# Altium PCB PCB2.PcbDoc
Units mm, origin at the board's own origin, x right, y up, seen from the top; angles counter-clockwise.
Board outline 228.98 x 105.92 mm, 2 copper layers (Top Layer, Bottom Layer); 64 components, 39 nets, 225 pads, 3 vias.
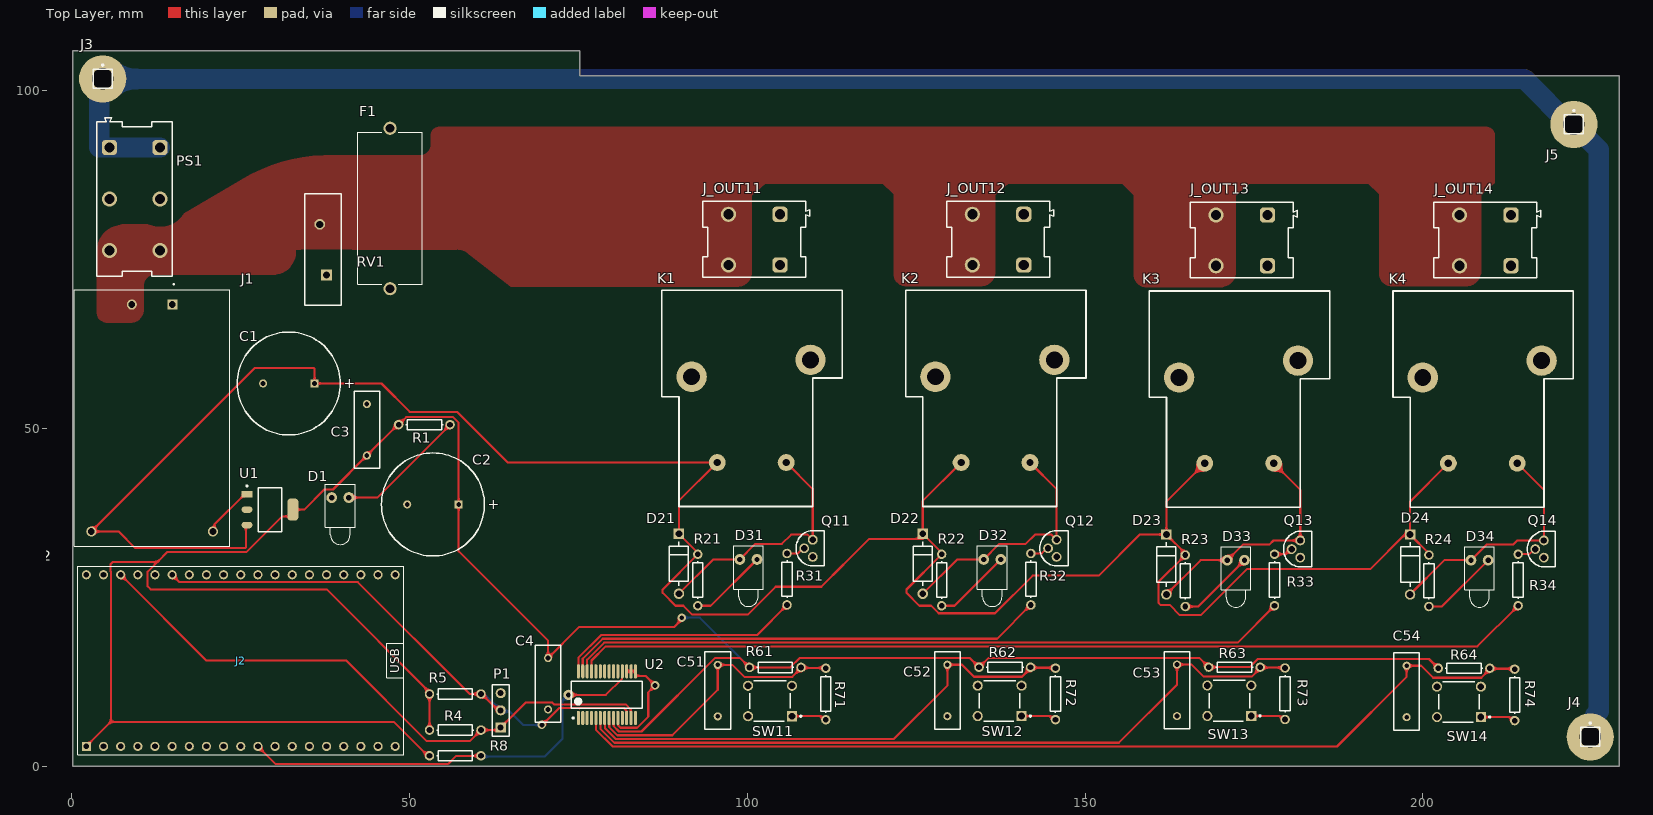
[diagram p0: Top Layer view]
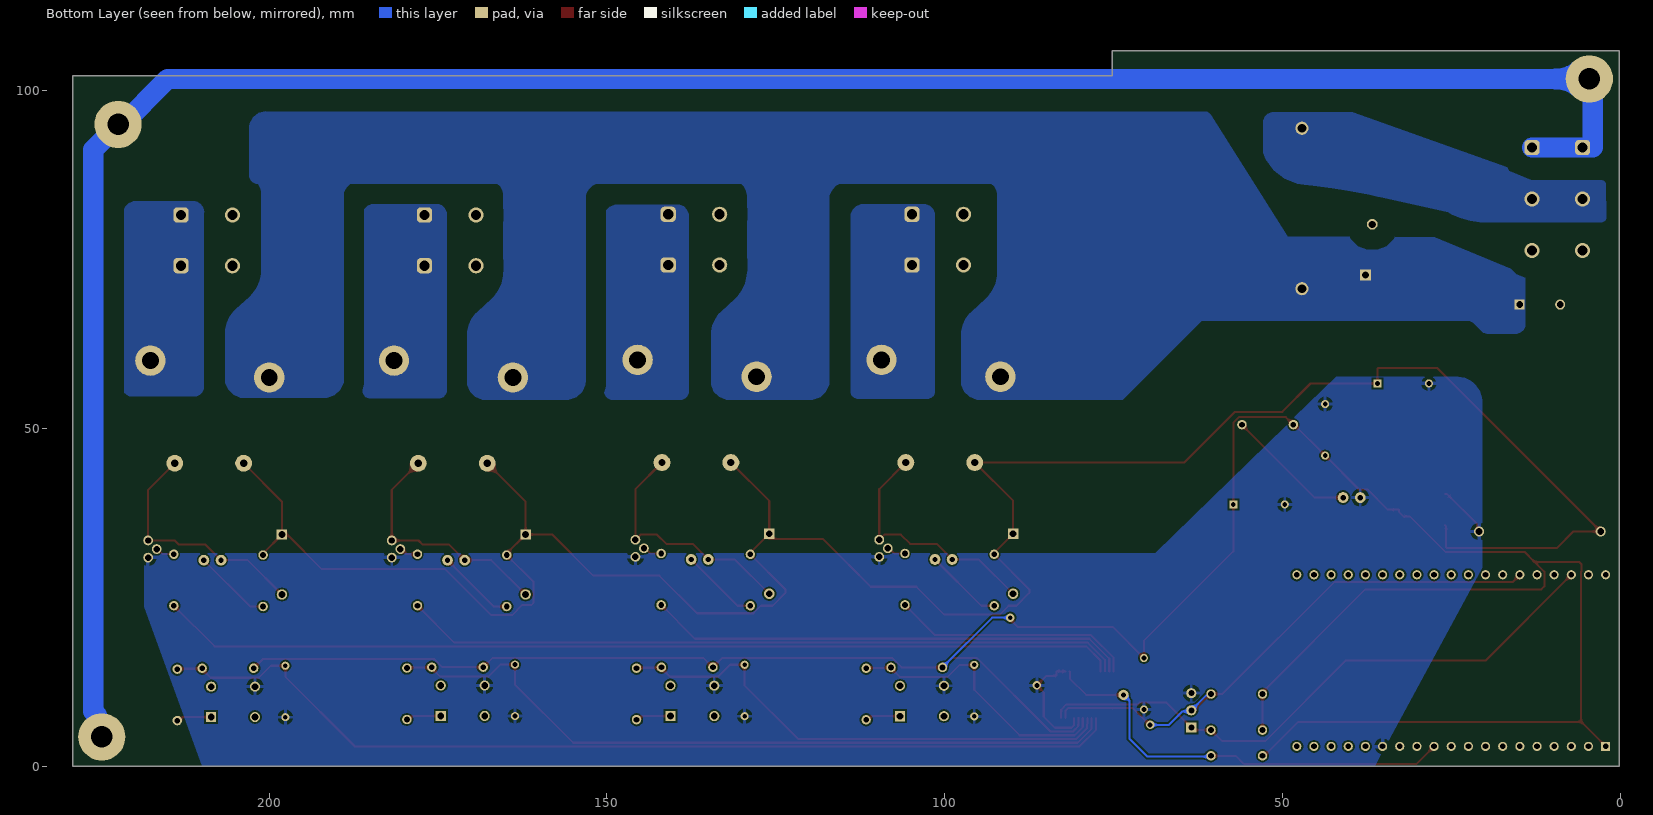
[diagram p1: Bottom Layer view, seen from below]

## Layer stack, top to bottom
Top Solder: solder mask 0.0102, Solder Resist, Dk 3.5
Top Layer: signal copper 0.0356
Dielectric 1: dielectric 0.32, FR-4, Dk 4.8
Bottom Layer: signal copper 0.0356
Bottom Solder: solder mask 0.0102, Solder Resist, Dk 3.5

## Board outline
0.127,0 229.108,0 229.108,0.127 229.108,102.235 75.184,102.235 75.184,105.918 0.127,105.918

## Design rules (kind name [scope] priority, off if disabled: settings)
Clearance Clearance_HV_PE_Isolation [InNetClass('PE_NETS') vs InNetClass('HV_NETS')] p1: gap=3 ignorepadtopadclearanceinfootprint=FALSE
Clearance Clearance_HV_Isolation [InNetClass('HV_Nets') vs InNetClass('LV_Nets')] p2: gap=6 ignorepadtopadclearanceinfootprint=FALSE
Clearance Clearance_HV_Internal [InNetClass('HV_Nets') vs InNetClass('HV_NETS')] p3: gap=3 ignorepadtopadclearanceinfootprint=FALSE
Clearance Clearance_SSOP [InComponent('U2')] p4: gap=0.18 ignorepadtopadclearanceinfootprint=FALSE
Clearance [All] p5: gap=0.25 ignorepadtopadclearanceinfootprint=FALSE
HoleSize [All] p1: absolutevalues=TRUE maxlimit=6 minlimit=0.025 maxpercent=80.000 minpercent=20.000
PolygonConnect Connect_HV_Solid [InNetClass('HV_NETS')] p1: connectstyle=Direct reliefconductorwidth=3 reliefentries=4 polygonreliefangle="90 Angle" airgapwidth=0.254
PolygonConnect [All] p2: connectstyle=Relief reliefconductorwidth=0.5 reliefentries=4 polygonreliefangle="90 Angle" airgapwidth=0.5
RoomDefinition Relay_Channel1 [InComponentClass('Relay_Channel1')] p1: confinementstyle=ConfineIn formatcopy=TRUE lockcomponents=FALSE outline 86.838,22.082 114.778,22.082 114.778,87.487 86.838,87.487
RoomDefinition U_PSU [InComponentClass('U_PSU')] p2: confinementstyle=ConfineIn formatcopy=TRUE lockcomponents=FALSE outline 0,30.096 62.484,30.096 62.484,108.712 0,108.712
RoomDefinition U_I2C [InComponentClass('U_I2C')] p3: confinementstyle=ConfineIn formatcopy=TRUE lockcomponents=FALSE outline 66.294,3.937 66.294,12.319 50.975,12.319 50.975,3.937
RoomDefinition U_Reset_Block [InComponentClass('U_Reset_Block')] p4: confinementstyle=ConfineIn formatcopy=TRUE lockcomponents=FALSE outline 61.468,0.127 61.468,2.921 52.07,2.921 52.07,0.127
RoomDefinition U_Earth_Connectors [InComponentClass('U_Earth_Connectors')] p5: confinementstyle=ConfineIn formatcopy=TRUE lockcomponents=FALSE outline 33.401,130.937 88.011,130.937 88.011,145.034 33.401,145.034
RoomDefinition Button_Input_Block2 [InComponentClass('Button_Input_Block2')] p6: confinementstyle=ConfineIn formatcopy=TRUE lockcomponents=FALSE outline 127.466,5.354 146.897,5.354 146.897,17.165 127.466,17.165
RoomDefinition Button_Input_Block3 [InComponentClass('Button_Input_Block3')] p7: confinementstyle=ConfineIn formatcopy=TRUE lockcomponents=FALSE outline 161.459,5.374 180.89,5.374 180.89,17.185 161.459,17.185
RoomDefinition U_IO_Expander [InComponentClass('U_IO_Expander')] p8: confinementstyle=ConfineIn formatcopy=TRUE lockcomponents=FALSE outline 67.845,5.589 84.863,5.589 84.863,18.162 67.845,18.162
RoomDefinition Button_Input_Block1 [InComponentClass('Button_Input_Block1')] p9: confinementstyle=ConfineIn formatcopy=TRUE lockcomponents=FALSE outline 93.472,5.334 112.903,5.334 112.903,17.145 93.472,17.145
RoomDefinition Button_Input_Block4 [InComponentClass('Button_Input_Block4')] p10: confinementstyle=ConfineIn formatcopy=TRUE lockcomponents=FALSE outline 195.453,5.207 214.884,5.207 214.884,17.018 195.453,17.018
RoomDefinition Relay_Channel2 [InComponentClass('Relay_Channel2')] p11: confinementstyle=ConfineIn formatcopy=TRUE lockcomponents=FALSE outline 122.936,22.082 150.876,22.082 150.876,87.487 122.936,87.487
RoomDefinition Relay_Channel3 [InComponentClass('Relay_Channel3')] p12: confinementstyle=ConfineIn formatcopy=TRUE lockcomponents=FALSE outline 159.004,21.971 186.944,21.971 186.944,87.376 159.004,87.376
RoomDefinition Relay_Channel4 [InComponentClass('Relay_Channel4')] p13: confinementstyle=ConfineIn formatcopy=TRUE lockcomponents=FALSE outline 195.072,21.971 223.012,21.971 223.012,87.376 195.072,87.376
RoomDefinition U_MCU_Core [InComponentClass('U_MCU_Core')] p14: confinementstyle=ConfineIn formatcopy=TRUE lockcomponents=FALSE outline 50.292,1.651 50.292,30.099 -0.127,30.099 -0.127,1.651
RoutingVias [All] p1: holewidth=0.711 width=1.27 viastyle="Through Hole" minholewidth=0.711 minwidth=1.27 maxholewidth=0.711 maxwidth=1.27
SilkToSilkClearance [All] p1: silktosilkclearance=0
SilkToSolderMaskClearance [IsPad] p1: minsilkscreentomaskgap=0 clearancetoexposedcopper=TRUE
SolderMaskExpansion [All] p1: expansion=0.102 istentingtop=FALSE
Width Width_PE [InNetClass('PE_NETS')] p1: maxlimit=3 minlimit=3 preferedwidth=3
Width Width_HV [InNetClass('HV_Nets')] p2: maxlimit=50 minlimit=3 preferedwidth=4
Width Width_1 [All] p3: maxlimit=0.508 minlimit=0.25 preferedwidth=0.305
27 further rules are at their usual default settings.

## Classes and differential pairs
net class PE_NETS: AC_PE
component class U_Earth_Connectors: J3 J4 J5
net class LV_NETS: +3V3 +5V DRV_SIG1 DRV_SIG2 DRV_SIG3 DRV_SIG4 GND IN_SIG1 IN_SIG2 IN_SIG3 IN_SIG4 NetD1_1 NetD21_2 NetD22_2 NetD23_2 NetD24_2 NetD31_1 NetD32_1 NetD33_1 NetD34_1 NetJ2_11 NetJ2_33 NetJ2_36 NetQ11_2 NetQ12_2 NetQ13_2 NetQ14_2
net class HV_NETS: AC_L_FUSED AC_N NetF1_1 NetJ_OUT11_1 NetJ_OUT12_1 NetJ_OUT13_1 NetJ_OUT14_1
channel class Relay_Channel: Relay_Channel1 Relay_Channel2 Relay_Channel3 Relay_Channel4
channel class Button_Input_Block: Button_Input_Block1 Button_Input_Block2 Button_Input_Block3 Button_Input_Block4
net class DRV_SIG[1..4]: DRV_SIG1 DRV_SIG2 DRV_SIG3 DRV_SIG4
component class U_Reset_Block: R8
component class U_PSU: C1 C2 C3 D1 F1 J1 PS1 R1 RV1 U1
component class U_MCU_Core: J2
component class U_IO_Expander: C4 U2
component class U_I2C: P1 R4 R5
component class Relay_Channel4: D24 D34 J_OUT14 K4 Q14 R24 R34
component class Relay_Channel3: D23 D33 J_OUT13 K3 Q13 R23 R33
component class Relay_Channel2: D22 D32 J_OUT12 K2 Q12 R22 R32
component class Relay_Channel1: D21 D31 J_OUT11 K1 Q11 R21 R31
component class Button_Input_Block4: C54 R64 R74 SW14
component class Button_Input_Block3: C53 R63 R73 SW13
component class Button_Input_Block2: C52 R62 R72 SW12
component class Button_Input_Block1: C51 R61 R71 SW11

## Components (designator, comment, footprint, x,y, rotation, side; value= is the part's Value field where it differs from the comment)
C1 "Cap Pol1" RB7.6-15 32.131,56.642 r0 top value=10uF
C2 "Cap Pol1" RB7.6-15 53.467,38.735 r0 top value=22uF
C3 "Cap" RAD-0.3 43.688,49.784 r270 top value=100nF
C4 "Cap" RAD-0.3 70.512,12.193 r90 top value=100nF
C51 "Cap" RAD-0.3 95.631,11.176 r90 top value=100nF (schematic designator C5)
C52 "Cap" RAD-0.3 129.625,11.196 r90 top value=100nF (schematic designator C5)
C53 "Cap" RAD-0.3 163.618,11.216 r90 top value=100nF (schematic designator C5)
C54 "Cap" RAD-0.3 197.612,11.049 r90 top value=100nF (schematic designator C5)
D1 "LED1" LED-1 39.751,39.751 r270 top
D21 "1N4007" FP-1N4007-MFG 89.886,29.956 r270 top value=15pF (schematic designator D2)
D22 "1N4007" FP-1N4007-MFG 125.984,29.956 r270 top value=15pF (schematic designator D2)
D23 "1N4007" FP-1N4007-MFG 162.052,29.845 r270 top value=15pF (schematic designator D2)
D24 "1N4007" FP-1N4007-MFG 198.12,29.845 r270 top value=15pF (schematic designator D2)
D31 "LED1" LED-1 100.173,30.591 r270 top (schematic designator D3)
D32 "LED1" LED-1 136.271,30.591 r270 top (schematic designator D3)
D33 "LED1" LED-1 172.339,30.48 r270 top (schematic designator D3)
D34 "LED1" LED-1 208.407,30.48 r270 top (schematic designator D3)
F1 "0031.8201" SCHURTER_0031.8201 47.117,82.55 r270 top
J1 "691254410003" 691254410003 9.271,83.947 r270 top
J2 "ESP32-DEVKITC" ESP32-DEVKITC 25.019,15.621 r90 top
J3 "Socket" PIN1 4.572,101.727 r0 top
J4 "Socket" PIN1 224.79,4.318 r0 top
J5 "Socket" PIN1 222.377,94.996 r0 top
J_OUT11 "691254410002" 691254410002 101.031,77.988 r180 top (schematic designator J_OUT1)
J_OUT12 "691254410002" 691254410002 137.129,77.988 r180 top (schematic designator J_OUT1)
J_OUT13 "691254410002" 691254410002 173.197,77.876 r180 top (schematic designator J_OUT1)
J_OUT14 "691254410002" 691254410002 209.265,77.876 r180 top (schematic designator J_OUT1)
K1 "SLA-05VDC-SL-A" Songle_SLA-05VDC-SL-A 87.361,38.442 r0 top (schematic designator K)
K2 "SLA-05VDC-SL-A" Songle_SLA-05VDC-SL-A 123.459,38.442 r0 top (schematic designator K)
K3 "SLA-05VDC-SL-A" Songle_SLA-05VDC-SL-A 159.527,38.331 r0 top (schematic designator K)
K4 "SLA-05VDC-SL-A" Songle_SLA-05VDC-SL-A 195.595,38.331 r0 top (schematic designator K)
P1 "Header 3" HDR1X3 63.5,5.715 r90 top
PS1 "HLK-5M05" CONV_HLK-5M05 11.89,51.526 r270 top
Q11 "SS8050DBU" FP-135AN-MFG 109.318,32.242 r0 top (schematic designator Q1)
Q12 "SS8050DBU" FP-135AN-MFG 145.416,32.242 r0 top (schematic designator Q1)
Q13 "SS8050DBU" FP-135AN-MFG 181.484,32.131 r0 top (schematic designator Q1)
Q14 "SS8050DBU" FP-135AN-MFG 217.552,32.131 r0 top (schematic designator Q1)
R1 "Res1" AXIAL-0.3 52.197,50.546 r180 top value=1K
R4 "Res1" AXIAL-0.3 56.769,5.334 r180 top value=4.7K
R5 "Res1" AXIAL-0.3 56.769,10.668 r180 top value=4.7K
R8 "Res1" AXIAL-0.3 56.769,1.524 r180 top value=10K
R21 "Res1" AXIAL-0.3 92.68,27.543 r90 top value=470 (schematic designator R2)
R22 "Res1" AXIAL-0.3 128.778,27.543 r90 top value=470 (schematic designator R2)
R23 "Res1" AXIAL-0.3 164.846,27.432 r90 top value=470 (schematic designator R2)
R24 "Res1" AXIAL-0.3 200.914,27.432 r90 top value=470 (schematic designator R2)
R31 "Res1" AXIAL-0.3 105.888,27.67 r90 top value=1K (schematic designator R3)
R32 "Res1" AXIAL-0.3 141.986,27.67 r90 top value=1K (schematic designator R3)
R33 "Res1" AXIAL-0.3 178.054,27.559 r90 top value=1K (schematic designator R3)
R34 "Res1" AXIAL-0.3 214.122,27.559 r90 top value=1K (schematic designator R3)
R61 "Res1" AXIAL-0.3 104.14,14.605 r180 top value=10K (schematic designator R6)
R62 "Res1" AXIAL-0.3 138.134,14.625 r180 top value=10K (schematic designator R6)
R63 "Res1" AXIAL-0.3 172.127,14.645 r180 top value=10K (schematic designator R6)
R64 "Res1" AXIAL-0.3 206.121,14.478 r180 top value=10K (schematic designator R6)
R71 "Res1" AXIAL-0.3 111.633,10.668 r90 top value=1K (schematic designator R7)
R72 "Res1" AXIAL-0.3 145.627,10.688 r90 top value=1K (schematic designator R7)
R73 "Res1" AXIAL-0.3 179.62,10.708 r90 top value=1K (schematic designator R7)
R74 "Res1" AXIAL-0.3 213.614,10.541 r90 top value=1K (schematic designator R7)
RV1 "MOV-14D471K" FP-MOV-14D471K-MFG 37.211,76.454 r90 top value=516pF
SW11 "B3F-1000" OMRON-B3F-1000-4_V 103.372,9.636 r180 top (schematic designator SW1)
SW12 "B3F-1000" OMRON-B3F-1000-4_V 137.366,9.656 r180 top (schematic designator SW1)
SW13 "B3F-1000" OMRON-B3F-1000-4_V 171.359,9.675 r180 top (schematic designator SW1)
SW14 "B3F-1000" OMRON-B3F-1000-4_V 205.353,9.509 r180 top (schematic designator SW1)
U1 "AMS1117-3.3" FP-AMS1117-IPC_A 29.337,37.973 r0 top
U2 "MCP23017-E/SS" SSOP-SS28_N 79.222,10.578 r90 top

## Footprints (in the part's own frame and the unit in brackets; to place one, negate y for a bottom-side part, rotate by r counter-clockwise, add the part's x,y. Pads: shape width x height; smd on the part's side, far side on the other; paste and mask are expansions set on the pad)
691254410002 [mm] "Serie 2544 - 7.62 mm _ 2 pins"
  rrect50% 2.25x2.25 hole 1.5: 1(-3.81,3.8) 1(-3.81,-3.7)
  round 2.25 hole 1.5: 2(3.81,3.8) 2(3.81,-3.7)
  silkscreen extent -8.22,-5.6 7.62,5.6, body extent -8.22,-5.6 7.62,5.6, height 18.05
691254410003 [mm] "Serie 2544 - 7.62 mm _ 3 pins"
  rrect50% 2.25x2.25 hole 1.5: 1(-7.62,-3.7) 1(-7.62,3.8)
  round 2.25 hole 1.5: 2(0,3.8) 2(0,-3.7) 3(7.62,-3.7) 3(7.62,3.8)
  silkscreen extent -12.03,-5.6 11.43,5.6, body extent -12.03,-5.6 11.43,5.6, height 18.05
AXIAL-0.3 [mm] "Axial Device, Thru-Hole; 2 Leads; 0.3 in Pin Spacing"
  round 1.4 hole 0.85: 1(-3.81,0) 2(3.81,0)
  silkscreen extent -2.77,-0.76 2.77,0.76
CONV_HLK-5M05 [mm]
  rect 1.5x1.5 / inner round 1.5 / far side rect 1.5x1.5 hole 1: 1(-16.8,3)
  round 1.5 hole 1: 2(-16.8,-3) 3(16.8,9) 4(16.8,-9)
  silkscreen extent -19.9,-11.5 19,11.5, body extent -19,-11.5 19,11.5, height 23
ESP32-DEVKITC [mm]
  rect 1.358x1.358 / inner round 1.358 / far side rect 1.358x1.358 hole 0.85 mask+0.102: 1(-12.7,22.86)
  round 1.358 hole 0.85 mask+0.102: 2(-12.7,20.32) 3(-12.7,17.78) 4(-12.7,15.24) 5(-12.7,12.7) 6(-12.7,10.16) 7(-12.7,7.62) 8(-12.7,5.08) 9(-12.7,2.54) 10(-12.7,0) 11(-12.7,-2.54) 12(-12.7,-5.08) 13(-12.7,-7.62) 14(-12.7,-10.16) 15(-12.7,-12.7) 16(-12.7,-15.24) 17(-12.7,-17.78) 18(-12.7,-20.32) 19(-12.7,-22.86) 20(12.7,-22.86) 21(12.7,-20.32) 22(12.7,-17.78) 23(12.7,-15.24) 24(12.7,-12.7) 25(12.7,-10.16) 26(12.7,-7.62) 27(12.7,-5.08) 28(12.7,-2.54) 29(12.7,0) 30(12.7,2.54) 31(12.7,5.08) 32(12.7,7.62) 33(12.7,10.16) 34(12.7,12.7) 35(12.7,15.24) 36(12.7,17.78) 37(12.7,20.32) 38(12.7,22.86)
  silkscreen extent -13.97,-24.13 13.97,24.13, body extent -13.97,-24.8 13.97,30.3, height 6.69
FP-1N4007-MFG [mm]
  rect 1.55x1.55 hole 1 paste-1000 mask+0: 1(-4.44,0)
  round 1.55 hole 1 paste-1000 mask+0: 2(4.44,0)
  silkscreen extent -3.26,-1.4 3.26,1.4, body extent -5.32,-1.5 5.32,1.5, height 0.25
FP-135AN-MFG [mm]
  round 1.45 hole 0.95 paste-1000 mask+0: 1(0.38,-1.27) 2(-0.89,0) 3(0.38,1.27)
  silkscreen extent -2.1,-2.6 2.09,2.6, body extent -2.19,-2.7 2.19,2.7, height 0.25
FP-AMS1117-IPC_A [mm]
  rect 1.604x0.952 smd paste+0 mask+0: 1(-3.395,2.29)
  rrect100% 1.604x0.952 smd paste+0 mask+0: 2(-3.395,0) 3(-3.395,-2.29)
  rrect59% 1.604x3.262 smd paste+0 mask+0: 4(3.395,0)
  silkscreen extent -3.52,-3.25 1.75,3.62, body extent -4.7,-3.75 4.7,3.75, height 0.25
FP-MOV-14D471K-MFG [mm]
  rect 1.6x1.6 hole 1.05 paste-1000 mask+0: 1(-3.75,-0.5)
  round 1.6 hole 1.05 paste-1000 mask+0: 2(3.75,0.5)
  silkscreen extent -8.25,-2.7 8.25,2.7, body extent -8.25,-2.7 8.25,2.7, height 20
HDR1X3 [mm] "Connector; Header; 3 Position"
  rect 1.5x1.5 hole 0.9: 1(0,0)
  round 1.5 hole 0.9: 2(2.54,0) 3(5.08,0)
  silkscreen extent -1.27,-1.27 6.35,1.27
LED-1 [mm] "LED; 2 Leads"
  round 1.6 hole 0.8: 1(0,1.27) 2(0,-1.27)
  silkscreen extent -2,-2.2 6.95,2.2
OMRON-B3F-1000-4_V [mm] "TH, 4-Leads, Body 6x6mm"
  rect 1.5x1.5 hole 1 paste+0: 1(-3.25,2.25)
  round 1.5 hole 1 paste+0: 2(3.25,2.25) 4(3.25,-2.25)
  round 1.5 hole 1 paste+0 mask+0.102: 3(-3.25,-2.25)
  silkscreen extent -4.68,-3 3,3, body extent -3,-3 3,3, height 4.5
PIN1 [mm] "Connector; Plug"
  round 7 hole 3.2: 1(0,0)
  silkscreen extent -1.4,-1.4 1.4,2.17
RAD-0.3 [mm] "Radial Cap, Thru-Hole; 2 Leads; 0.3 in Pin Spacing"
  round 1.2 hole 0.7: 1(-3.81,0) 2(3.81,0)
  silkscreen extent -5.71,-1.91 5.71,1.91
RB7.6-15 [mm] "Polarized Capacitor (Radial); 2 Leads"
  rect 1.2x1.2 hole 0.7: 1(3.81,0)
  round 1.2 hole 0.7: 2(-3.81,0)
  silkscreen extent -7.62,-7.62 7.62,7.62
SCHURTER_0031.8201 [mm]
  round 1.95 hole 1.3: 1(-11.875,0) 2(11.875,0)
  silkscreen extent -11.25,-4.8 11.25,4.8
Songle_SLA-05VDC-SL-A [mm]
  round 2.5 hole 1.1: 1(8.2,6.5) 2(18.4,6.5)
  round 4.5 hole 2.5: 3(4.4,19.2) 4(22,21.7)
  silkscreen extent 0,0 26.7,32
SSOP-SS28_N [mm] "SOP, 28-Leads, Body 10.2x5.2mm, Pitch 0.65mm, IPC Medium Density"
  oval 2.1x0.45 smd: 1(-3.45,4.225) 2(-3.45,3.575) 3(-3.45,2.925) 4(-3.45,2.275) 5(-3.45,1.625) 6(-3.45,0.975) 7(-3.45,0.325) 8(-3.45,-0.325) 9(-3.45,-0.975) 10(-3.45,-1.625) 11(-3.45,-2.275) 12(-3.45,-2.925) 13(-3.45,-3.575) 14(-3.45,-4.225) 15(3.45,-4.225) 16(3.45,-3.575) 17(3.45,-2.925) 18(3.45,-2.275) 19(3.45,-1.625) 20(3.45,-0.975) 21(3.45,-0.325) 22(3.45,0.325) 23(3.45,0.975) 24(3.45,1.625) 25(3.45,2.275) 26(3.45,2.925) 27(3.45,3.575) 28(3.45,4.225)
  silkscreen extent -3.57,-5.25 2,5.25, body extent -2.8,-5.25 2.8,5.25, height 2

## Part data
C1 C2: "Polarized Capacitor (Radial)", LatestRevisionDate=17-Jul-2002, LatestRevisionNote="Re-released for DXP Platform.", PackageDescription="Polarized Capacitor (Radial); 2 Leads", PackageReference=RB7.6-15, Published=8-Jun-2000, Publisher="Altium Limited"
C3 C4 C51 C52 C53 C54: "Capacitor", LatestRevisionDate=17-Jul-2002, LatestRevisionNote="Re-released for DXP Platform.", PackageDescription="Radial Cap, Thru-Hole; 2 Leads; 0.3 in Pin Spacing", PackageReference=RAD-0.3, Published=8-Jun-2000, Publisher="Altium Limited"
D1 D31 D32 D33 D34: "Typical RED GaAs LED", LatestRevisionDate=08-Jul-2005, LatestRevisionNote="Mech Layer 1 removed.", PackageDescription="LED; 2 Leads", PackageReference=LED-1, Published=8-Jun-2000, Publisher="Altium Limited"
D21 D22 D23 D24: library part CMP-123542-000001-1, "Rectifier diode 1000 V 1 A DO-41, ,", Capacitance=15pF, Forward Current=1A, Manufacturer=Diotec, Max Junction Temp=+175°C, Max Repetitive Reverse Voltage=1000V, Max Surge Forward Current=27A, Peak Reverse Current=5uA, Temperature="-50°C to +175°C", Temperature Range Low=-50°C, Automotive=No, Category=Diode, ComponentLink2Description=Datasheet, ComponentLink2URL=https://datasheet.octopart.com/1N4007-Diotec-datasheet-62346875.pdf, Device Class L1="Discrete Semiconductors", Device Class L2=Diodes, Device Class L3="Rectifier Diodes", Height=2.8mm, Ipc Land Pattern Name=DIOAD888W100L520D280, Lead Free=Yes, Manufacturer Part Number=1N4007, Octopart=https://octopart.com/1n4007-diotec-4040411, Package=1N4007, Reverse Voltage=1000V, RoHS=TRUE, Temperature Range High=+175°C
F1: "Fuse Block 10A 500V 1 Circuit Cartridge Through Hole", Package=None, Availability=Unavailable, MF="Schurter Inc.", MP=0031.8201, Price=None, SnapEDA_Link=https://www.snapeda.com/parts/0031.8201/Schurter%20Inc./view-part/235177/?ref=snap
J1: library part CMP-1502-02749-3, "Terminal Block, 7.62MM Pitch, Horizontal, Dual Pin, 12-30 AWG, 3 Pin"
J2: "ESP32-WROOM-32UE series Transceiver; 802.11 b/g/n (Wi-Fi, WiFi, WLAN), Bluetooth Â® Smart Ready 4.x Dual Mode Evaluation Board", Package=None, Check_prices=https://www.snapeda.com/parts/ESP32-DEVKITC/Espressif+Systems/view-part/?ref=eda, MF="Espressif Systems", MP=ESP32-DEVKITC, SnapEDA_Link=https://www.snapeda.com/parts/ESP32-DEVKITC/Espressif+Systems/view-part/?ref=snap
J_OUT11 J_OUT12 J_OUT13 J_OUT14: library part CMP-1502-02748-3, "Terminal Block, 7.62MM Pitch, Horizontal, Dual Pin, 12-30 AWG, 2 Pin"
P1: "Header, 3-Pin", LatestRevisionDate=17-Jul-2002, LatestRevisionNote="Re-released for DXP Platform.", Publisher="Altium Limited"
PS1: "AC DC 220V to 5V 5W 5Watt Isolated Switching Step-Down Power Supply Module Converter", Package=Package, Availability="Not in stock", Check_prices=https://www.snapeda.com/parts/HLK-5M05/Hi-link/view-part/?ref=eda, MF=Hi-link, MP=HLK-5M05, Price=None, SnapEDA_Link=https://www.snapeda.com/parts/HLK-5M05/Hi-link/view-part/?ref=snap
Q11 Q12 Q13 Q14: library part CMP-00278-84331634-1, "SS8050DBU Bipolar (BJT) Single Transistor, NPN, 25 V, 100 MHz, 1 W, 1.5 A, 160", Case/Package=TO-92, Collector Base Voltage (VCBO)=40V, Collector Emitter Breakdown Voltage=25V, Collector Emitter Saturation Voltage=500mV, Current Rating=1.5A, Emitter Base Voltage (VEBO)=6V, Frequency=100MHz, Manufacturer Lifecycle Status=ACTIVE, Max Junction Temperature (Tj)=150°C, Max Power Dissipation=1W, Min Operating Temperature=-65°C, Output Power=2W, Collector Emitter Voltage (VCEO)=25V, Element Configuration=Single, Gain Bandwidth Product=100MHz, Height=4.58mm, hFE Min=85, Lead Free="Lead Free", Length=4.58mm, Lifecycle Status=Production, Max Collector Current=1.5A, Max Frequency=100MHz, Max Operating Temperature=150°C, Mount="Through Hole", NexarPartId=84331634, Number of Elements=1, Number of Pins=3, Packaging=Bulk, Polarity=NPN, Power Dissipation=1W, Radiation Hardening=No, REACH SVHC="No SVHC", RoHS=Compliant, Schedule B="8541290080, 8541290080", Transition Frequency=100MHz, Voltage Rating (DC)=25V, Weight=179mg, Width=3.86mm
R1 R4 R5 R8 R21 R22 R23 R24 R31 R32 R33 R34 R61 R62 R63 R64 R71 R72 R73 R74: "Resistor", LatestRevisionDate=17-Jul-2002, LatestRevisionNote="Re-released for DXP Platform.", PackageDescription="Axial Device, Thru-Hole; 2 Leads; 0.3 in Pin Spacing", PackageReference=AXIAL-0.3, Published=8-Jun-2000, Publisher="Altium Limited"
RV1: library part CMP-07402-000007-1, "VARISTOR 470V 4.5KA DISC 14MM", Capacitance=516pF, Clamping Current=50A, Clamping Voltage=775V, Manufacturer="Bourns Inc.", Package=Radial, Temperature="-40°C to +105°C", Temperature Range High=+105°C, Temperature Range Low=-40°C, Varistor Voltage=423V, Voltage Rating Ac=300V, Voltage Rating Dc=385V, Voltage Tolerance=10%, Automotive=No, Category=Res, ComponentLink2Description=Datasheet, ComponentLink2URL=https://www.bourns.com/docs/product-datasheets/mov14d.pdf?sfvrsn=d6ed188_26, Device Class L1="Circuit Protection", Device Class L2=Varistors, Device Class L3=unset, Digikey Description="VARISTOR 470V 4.5KA DISC 14MM", Esd Protec Present=true, Height=20mm, Lead Free=Yes, Manufacturer Part Number=MOV-14D471K, Mouser Description="Varistors 470volts 14mm", Octopart=https://octopart.com/mov-14d471k-bourns-21388916, RoHS=TRUE
SW11 SW12 SW13 SW14: library part CMP-1677-00002-1, "Tactile Switch, SPST-NO, 0.05 A, 5 to 24 V, -25 to 70 degC, 4-Pin THD, RoHS, Bulk", Capacitance="-45 f", Current Rating="1.5 A", Max Operating Temperature="70 degC", Min Operating Temperature="-40 degC", Package Quantity=1080, Voltage Rating="150 V", ComponentLink1Description="Manufacturer URL", ComponentLink1URL=http://www.omron.com/, ComponentLink2Description=Datasheet, ComponentLink2URL=http://www.omron.com/ecb/products/pdf/en-b3f.pdf, Contact Material=Brass, Contact Plating=Gold, DatasheetVersion=Jan-15, Gender=Female, Height="14.99 mm", Lead Pitch="1.27 mm", Length="18.34 mm", Mount="Through Hole", PackageDescription="4-Pin Through Hole Device, Body 6 x 6 mm", PackageReference=B3F-1000, Packaging=Tray, Pins=8, Radiation Hardening=No, RoHSCompliant=true, Shielding=Shielded, Width="25.4 mm"
U1: library part CMP-209535-000001-1, "LDO Voltage Regulators 1A, 3.3V", Dropout Voltage=1.1V, Manufacturer="Advanced Monolithic Systems", Max Junction Temp=+125°C, Max Power Dissipation=1.2W, Max Supply Voltage=15V, Nominal Supply Current=5mA, Output Current=1A, Output Voltage=3.3V, Package=AMS1117, Temperature="-40°C to +125°C", Temperature Range Low=-40°C, Automotive=No, Category=IC, ComponentLink2Description=Datasheet, ComponentLink2URL=http://www.advanced-monolithic.com/pdf/ds1117.pdf, Device Class L1="Integrated Circuits (ICs)", Device Class L2="Power Management ICs", Device Class L3="Voltage Regulators - Linear", Height=1.8mm, Ipc Land Pattern Name=SOT229P700X180-4, Lead Free=Yes, Manufacturer Part Number=AMS1117-3.3, Number Of Outputs=1, Octopart=https://octopart.com/ams1117-3.3-advanced+monolithic+systems-25899300, Output Type=Fixed, RoHS=TRUE, Standoff Height=0.64mm, Temperature Range High=+125°C
U2: library part CMP-0186-00176-2, "16-Bit I/O Expander with Serial Interface, 28-Pin SSOP, Extended Temperature", Code_JEDEC=MS-150, ComponentLink1Description="Manufacturer URL", ComponentLink1URL=http://www.microchip.com/, ComponentLink2Description=Datasheet, ComponentLink2URL=http://ww1.microchip.com/downloads/en/DeviceDoc/21952b.pdf, ComponentLink3Description="Package Specification", ComponentLink3URL=http://www.microchip.com/stellent/groups/techpub_sg/documents/packagingspec/en012702.pdf, DatasheetVersion="revB, Feb-2007", PackageDescription="28-Lead Plastic Shrink Small Outline (SS) - 5.3mm Body [SSOP]", PackageReference=SSOP-SS28, PackageVersion="revBB, Aug-2009", RevisionNote="URLs added."
J3 J4 J5: LatestRevisionDate=17-Jul-2002, LatestRevisionNote="Re-released for DXP Platform.", Publisher="Altium Limited"

## Free pads (board coordinates)
  round 1.524 hole 0.762: 2(73.533,10.541)

## Via types
v1: diameter 1.27, hole 0.711, Top Layer to Bottom Layer, 3 vias

## Nets (pads, with @x,y where several pads share a name; then routed paths per layer and width w, separated by ;. In a path a pad name is that pad's centre, name@x,y a point inside that pad or via, vN(x,y) a via of type N, cw(c..) or ccw(c..) an arc to the next point about the centre after c; other vN are vias at no path point)
+3V3: C2.1 C3.2 C4.2 J2.1 R1.2 R4.2 R5.2 R8.2 R61.2 R62.2 R63.2 R64.2 U1.4 U2.9 | length 404.8
  Top Layer w0.305: J2.1 5.78,6.542 ; R8.2@52.832,1.397 47.687,6.542 5.78,6.542 ; R4.2 R5.2 52.959,10.922 37.719,26.162 11.684,26.162 11.238,26.608 11.238,28.769 12.705,30.236 ; U2.9@80.22,7.151 U2.9 80.22,7.106 80.22,5.909 81.008,5.121 84.348,5.121 95.216,15.988 98.947,15.988 R61.2 106.391,14.605 107.794,16.008 132.94,16.008 R62.2 135.727,16.028 166.934,16.028 R63.2 174.378,14.645 175.595,15.861 200.928,15.861 R64.2 ; v1(90.297,21.971) 90.297,21.717 89.154,20.574 75.083,20.574 C4.2 70.512,18.543 57.277,31.777 C2.1 57.277,50.835 56.464,51.648 49.489,51.648 R1.2 48.26,50.546 C3.2 38.667,40.953 37.381,40.953 34.401,37.973 U1.4 32.732,37.593 32.107,36.968 31.148,36.968 25.884,31.703 14.172,31.703 12.705,30.236 ; 5.78,6.542 5.78,28.769 5.715,28.834 5.715,29.845 6.106,30.236 12.705,30.236
  Bottom Layer w0.305: v1(90.297,21.971) 92.964,21.971 R61.2
+5V: C1.1 D21.1 D22.1 D23.1 D24.1 K1.1 K2.1 K3.1 K4.1 PS1.4 R21.2 R22.2 R23.2 R24.2 U1.3 | length 361.1
  Top Layer w0.305: U1.3 25.781,35.522 25.781,32.385 25.654,32.258 9.398,32.258 6.93,34.726 PS1.4 27.092,58.928 35.814,58.928 35.941,58.801 C1.1 45.847,56.642 50.038,52.451 57.023,52.451 64.524,44.95 K1.1@95.583,44.95 ; K1.1 89.886,39.267 D21.1 92.68,31.602 R21.2 87.473,26.146 87.473,25.638 89.378,23.733 90.521,23.733 91.791,22.463 100.13,22.463 104.216,26.549 110.954,26.549 114.25,29.845 ; 114.279,29.861 118.069,33.65 D22.1@125.984,33.65 ; K2.1 125.984,39.267 D22.1 128.778,31.602 R22.2 123.571,26.146 123.571,25.638 125.476,23.733 127.219,23.733 128.321,22.631 136.677,22.631 142.24,28.194 152.019,28.194 158.11,34.285 D23.1 ; K3.1 162.052,39.156 D23.1 ; D24.1@197.358,34.285 192.283,29.21 173.99,29.21 167.132,22.352 164.041,22.352 162.517,23.876 161.163,23.876 160.875,24.164 160.875,27.271 R23.2 164.846,31.491 D23.1 ; R24.2 200.914,31.491 D24.1 198.12,39.156 K4.1
AC_L_FUSED: F1.2 K1.3 K2.3 K3.3 K4.3 PS1.1 RV1.1
AC_N: J1.3 J_OUT11.2 J_OUT12.2 J_OUT13.2 J_OUT14.2 PS1.2 RV1.2
AC_PE: J1.1 J3.1 J4.1 J5.1 | length 332.5
  Bottom Layer w3: J1.1@13.071,91.567 5.571,91.567 4.064,91.567 4.064,101.219 J3.1 215.017,101.727 J5.1@222.082,94.662 ; J5.1 ccw(c225.328,97.696) 222.593,94.777 222.733,94.646 222.733,94.566 226.06,91.239 226.06,8.075 225.555,7.571 225.555,5.083 J4.1
DRV_SIG1: R31.1 U2.28 | length 36.2
  Top Layer w0.305: U2.28 74.997,16.033 78.374,19.41 101.452,19.41 R31.1@105.918,23.876
DRV_SIG2: R32.1 U2.27 | length 71.5
  Top Layer w0.305: U2.27 75.647,15.898 78.604,18.855 136.98,18.855 R32.1
DRV_SIG3: R33.1 U2.26 | length 106.8
  Top Layer w0.305: U2.26 76.297,15.763 78.822,18.288 172.593,18.288 R33.1
DRV_SIG4: R34.1 U2.25 | length 142.1
  Top Layer w0.305: U2.25 76.947,15.629 79.032,17.713 208.086,17.713 R34.1
GND: C1.2 C2.2 C3.1 C4.1 C51.1 C52.1 C53.1 C54.1 D1.2 J2.14 P1.3 PS1.3 Q11.1 Q12.1 Q13.1 Q14.1 SW11.4 SW12.4 SW13.4 SW14.4 U1.1 U2.10 U2.15 U2.16 U2.17 | length 24.7
  Top Layer w0.305: PS1.3 21.119,34.955 21.119,35.766 25.616,40.263 U1.1 ; U2.10 80.87,7.106 80.87,6.043 81.237,5.676 83.707,5.676 85.344,7.313 85.344,10.922 v1(86.36,11.938) 84.942,13.356 83.514,13.356 83.447,13.423 U2.15 U2.16 U2.17
IN_SIG1: C51.2 R61.1 R71.2 U2.8 | length 41.8
  Top Layer w0.305: U2.8 79.57,7.106 79.57,5.774 80.778,4.566 88.894,4.566 95.631,11.303 C51.2 97.79,14.986 99.568,13.208 106.68,13.208 107.95,14.478 R61.1 108.013,14.541 111.569,14.541 R71.2
IN_SIG2: C52.2 R62.1 R72.2 U2.7 | length 76.7
  Top Layer w0.305: U2.7 78.897,6.259 78.92,6.236 78.92,5.64 80.548,4.011 121.712,4.011 129.625,11.924 C52.2 131.784,15.006 133.562,13.228 140.674,13.228 141.944,14.498 R62.1 142.007,14.561 145.563,14.561 R72.2@145.655,14.469
IN_SIG3: C53.2 R63.1 R73.2 U2.6 | length 111.8
  Top Layer w0.305: U2.6 78.247,5.528 80.318,3.457 155.013,3.457 163.618,12.062 C53.2 165.777,15.026 167.555,13.248 174.667,13.248 175.937,14.518 R63.1 176.001,14.581 179.557,14.581 R73.2
IN_SIG4: C54.2 R64.1 R74.2 U2.5 | length 146.1
  Top Layer w0.305: U2.5 77.597,5.393 80.088,2.902 187.306,2.902 197.612,13.208 C54.2 199.771,14.859 201.549,13.081 208.661,13.081 209.931,14.351 R64.1 209.994,14.414 213.55,14.414 R74.2
NetD1_1: D1.1 R1.1 | length 19.5
  Top Layer w0.305: D1.1 45.212,39.751 R1.1
NetD21_2: D21.2 D31.2 K1.2 Q11.3 | length 36.8
  Top Layer w0.305: D21.2 94.961,30.591 D31.2 101.205,32.893 105.124,32.893 106.505,34.274 108.936,34.274 Q11.3 109.698,41.005 K1.2
NetD22_2: D22.2 D32.2 K2.2 Q12.3 | length 36.8
  Top Layer w0.305: D22.2 131.059,30.591 D32.2 137.303,32.893 141.222,32.893 142.603,34.274 145.034,34.274 Q12.3 145.796,41.005 K2.2
NetD23_2: D23.2 D33.2 K3.2 Q13.3 | length 36.2
  Top Layer w0.305: D23.2 167.127,30.48 D33.2 173.371,32.782 177.29,32.782 177.909,33.401 Q13.3 181.864,40.894 K3.2
NetD24_2: D24.2 D34.2 K4.2 Q14.3 | length 36.2
  Top Layer w0.305: D24.2 203.195,30.48 D34.2 209.439,32.782 213.358,32.782 213.977,33.401 Q14.3 217.932,40.894 K4.2
NetD31_1: D31.1 R21.1 | length 11.6
  Top Layer w0.305: R21.1 94.585,23.733 D31.1
NetD32_1: D32.1 R22.1 | length 11.6
  Top Layer w0.305: R22.1 130.683,23.733 D32.1
NetD33_1: D33.1 R23.1 | length 11.6
  Top Layer w0.305: R23.1 166.751,23.622 D33.1
NetD34_1: D34.1 R24.1 | length 11.6
  Top Layer w0.305: R24.1 202.819,23.622 D34.1
NetF1_1: F1.1 J1.2
NetJ2_11: J2.11 pad.2 R8.1 U2.18 | length 64.5
  Top Layer w0.305: J2.11 30.185,0.295 55.714,0.295 ; 55.841,0.422 56.944,1.524 R8.1 ; pad.2 79.072,10.541 81.475,12.943 81.475,14.006 U2.18
  Bottom Layer w0.305: R8.1 60.706,1.397 69.977,1.397 72.644,4.064 72.644,9.652 pad.2
NetJ2_33: J2.33 P1.2 R5.1 U2.12 | length 82.6
  Top Layer w0.305: J2.33 15.94,27.24 42.351,27.24 58.923,10.668 R5.1 60.706,10.668 63.246,8.128 P1.2@63.373,8.128 ; v1@69.628,6.082 72.127,8.581 75.143,8.581 75.143,8.564 75.16,8.581 81.757,8.581 82.125,8.213 82.125,7.151 U2.12
  Bottom Layer w0.305: R5.1 60.789,10.458 61.297,10.458 63.668,8.087 64.811,8.087 66.802,6.096 v1(69.596,6.096)
NetJ2_36: J2.36 P1.1 R4.1 U2.13 | length 89.8
  Top Layer w0.305: J2.36 19.922,15.638 40.617,15.638 52.571,3.683 58.928,3.683 R4.1 63.119,5.334 P1.1 67.17,9.385 71.133,9.385 71.383,9.135 81.987,9.135 82.775,8.348 82.775,7.151 U2.13
NetJ_OUT11_1: J_OUT11.1 K1.4
NetJ_OUT12_1: J_OUT12.1 K2.4
NetJ_OUT13_1: J_OUT13.1 K3.4
NetJ_OUT14_1: J_OUT14.1 K4.4
NetQ11_2: Q11.2 R31.2 | length 2.9
  Top Layer w0.305: R31.2 107.518,31.48 108.28,32.242 Q11.2
NetQ12_2: Q12.2 R32.2 | length 2.9
  Top Layer w0.305: R32.2 143.616,31.48 144.378,32.242 Q12.2
NetQ13_2: Q13.2 R33.2 | length 2.9
  Top Layer w0.305: R33.2 179.684,31.369 180.446,32.131 Q13.2
NetQ14_2: Q14.2 R34.2 | length 2.9
  Top Layer w0.305: R34.2 215.752,31.369 216.514,32.131 Q14.2
NetR71_1: R71.1 SW11.1 | length 5.2
  Top Layer w0.305: SW11.1 110.809,7.386 111.337,6.858 R71.1
NetR72_1: R72.1 SW12.1 | length 5.2
  Top Layer w0.305: SW12.1 144.803,7.406 145.33,6.878 R72.1
NetR73_1: R73.1 SW13.1 | length 5.2
  Top Layer w0.305: SW13.1 178.796,7.425 179.324,6.898 R73.1
NetR74_1: R74.1 SW14.1 | length 5.2
  Top Layer w0.305: SW14.1 212.79,7.259 213.318,6.731 R74.1
pads on no net: J2.2 J2.3 J2.4 J2.5 J2.6 J2.7 J2.8 J2.9 J2.10 J2.12 J2.13 J2.15 J2.16 J2.17 J2.18 J2.19 J2.20 J2.21 J2.22 J2.23 J2.24 J2.25 J2.26 J2.27 J2.28 J2.29 J2.30 J2.31 J2.32 J2.34 J2.35 J2.37 J2.38 SW11.2 SW11.3 SW12.2 SW12.3 SW13.2 SW13.3 SW14.2 SW14.3 U1.2 U2.1 U2.2 U2.3 U2.4 U2.11 U2.14 U2.19 U2.20 U2.21 U2.22 U2.23 U2.24

## Polygon pours and split planes (outlines as drawn)
NetJ_OUT14_1 on Bottom Layer "NetJ_OUT_Relay_Channel1_1" (solid, pour order 39): 210.989,83.608 219.753,83.608 cw(c219.753,81.746) 221.615,81.746 221.615,55.922 cw(c220.472,55.922) 220.472,54.779 211.032,54.779 cw(c211.032,56.134) 209.677,56.134 209.677,81.746 cw(c211.264,82.021)
AC_L_FUSED on Bottom Layer "NetJ_OUT_Relay_Channel4_1" (solid, remove dead copper, pour order 21): 15.494,64.008 cw(c15.494,65.405) 14.097,65.405 14.097,72.771 27.463,78.319 49.207,78.359 60.647,96.405 cw(c61.549,95.833) 61.549,96.901 62.103,96.901 62.103,65.913 22.532,65.913 ccw(c22.532,64.866) 21.791,65.606 20.627,64.442 cw(c19.58,65.488) 19.58,64.008
NetJ_OUT11_1 on Bottom Layer "NetJ_OUT_Relay_Channel1_1" (solid, pour order 7): 103.124,83.185 112.057,83.185 cw(c112.057,81.323) 113.919,81.323 113.919,55.508 cw(c112.776,55.499) 112.776,54.356 102.616,54.356 cw(c102.616,55.499) 101.473,55.499 101.473,81.534 cw(c103.124,81.534)
NetJ_OUT12_1 on Bottom Layer "NetJ_OUT_Relay_Channel1_1" (solid, pour order 37): 139.584,83.098 148.517,83.098 cw(c148.517,81.236) 150.379,81.236 150.379,55.412 cw(c149.236,55.412) 149.236,54.269 139.076,54.269 cw(c139.076,55.412) 137.933,55.412 137.933,81.447 cw(c139.584,81.447)
NetJ_OUT13_1 on Bottom Layer "NetJ_OUT_Relay_Channel1_1" (solid, pour order 38): 175.398,83.271 184.331,83.271 cw(c184.331,81.409) 186.193,81.409 186.193,55.585 cw(c185.05,55.585) 185.05,54.442 174.89,54.442 cw(c174.89,55.585) 173.747,55.585 173.747,81.62 cw(c175.398,81.62)
AC_L_FUSED on Bottom Layer "NetJ_OUT_Relay_Channel4_1" (solid, pour order 24): 202.946,94.615 202.946,87.376 cw(c201.803,87.376) 201.803,86.233 60.96,86.233 60.96,96.139 cw(c61.722,96.139) 61.722,96.901 200.025,96.901 cw(c200.379,94.344)
AC_L_FUSED on Bottom Layer "NetJ_OUT_Relay_Channel4_1" (solid, pour order 36): 188.976,86.68 187.071,86.68 cw(c186.373,84.076) 188.976,84.775 188.976,57.343 ccw(c191.897,57.47) 192.024,54.549 203.708,54.549 ccw(c203.708,57.343) 206.502,57.343 206.502,64.114 ccw(c201.756,64.115) 204.971,67.607 202.903,69.511 cw(c206.546,73.467) 201.168,73.467 201.168,84.775 cw(c203.327,84.775) 202.311,86.68
AC_L_FUSED on Bottom Layer "NetJ_OUT_Relay_Channel4_1" (solid, pour order 35): 153.162,86.36 151.257,86.36 cw(c150.559,83.757) 153.162,84.455 153.162,57.023 ccw(c156.083,57.15) 156.21,54.229 167.894,54.229 ccw(c167.894,57.023) 170.688,57.023 170.688,63.794 ccw(c165.942,63.795) 169.157,67.287 167.089,69.191 cw(c170.732,73.147) 165.354,73.147 165.354,84.455 cw(c167.513,84.455) 166.497,86.36
AC_L_FUSED on Bottom Layer "NetJ_OUT_Relay_Channel4_1" (solid, pour order 34): 80.01,86.36 78.105,86.36 cw(c77.407,83.757) 80.01,84.455 80.01,57.023 ccw(c82.931,57.15) 83.058,54.229 94.742,54.229 ccw(c94.742,57.023) 97.536,57.023 97.536,63.794 ccw(c92.79,63.795) 96.005,67.287 93.937,69.191 cw(c97.58,73.147) 92.202,73.147 92.202,84.455 cw(c94.361,84.455) 93.345,86.36
AC_L_FUSED on Bottom Layer "NetJ_OUT_Relay_Channel4_1" (solid, pour order 25): 117.072,86.362 115.168,86.362 cw(c114.469,83.759) 117.073,84.457 117.073,57.025 ccw(c119.993,57.152) 120.12,54.231 131.805,54.231 ccw(c131.805,57.025) 134.599,57.025 134.599,63.796 ccw(c129.852,63.797) 133.067,67.289 130.999,69.194 cw(c134.643,73.15) 129.265,73.15 129.265,84.457 cw(c131.424,84.457) 130.408,86.362
NetF1_1 on Bottom Layer "NetJ_OUT_Relay_Channel4_1" (solid, pour order 20): 20.136,80.518 2.791,80.518 cw(c2.79,81.238) 2.07,81.248 2.137,86.088 cw(c2.799,86.078) 2.799,86.741 11.255,86.741 39.605,96.774 51.308,96.774 cw(c51.308,95.25) 52.832,95.25 52.832,90.805 cw(c46.068,93.239) 46.808,86.089 ccw(c56.701,-9.46) 35.741,84.285 25.429,81.979 cw(c20.136,90.835)
GND on Bottom Layer "NetJ_OUT_Relay_Channel4_1" (solid, pour order 17): 20.447,29.337 20.447,53.848 cw(c24.257,53.848) 24.257,57.658 42.037,57.658 68.834,31.496 218.527,31.496 218.527,23.609 209.926,0 36.322,0
AC_L_FUSED on Bottom Layer "NetJ_OUT_Relay_Channel4_1" (solid, pour order 23): 61.976,65.913 73.66,54.229 82.55,54.229 82.55,94.488 61.976,94.488
AC_N on Top Layer "NetJ_OUT_Relay_Channel4_1" (solid, pour order 19): 38.061,90.433 51.59,90.451 ccw(c51.588,92.026) 53.162,92.026 53.162,93.421 cw(c54.356,93.421) 54.356,94.615 59.944,94.615 cw(c59.944,92.456) 62.103,92.456 62.103,90.424 62.103,86.36 62.103,78.613 cw(c59.055,78.613) 59.055,75.565 58.791,75.787 ccw(c56.962,73.612) 56.961,76.454 33.318,76.475 ccw(c33.318,76.299) 33.142,76.289 cw(c29.799,76.092) 30.226,72.771 12.319,72.771 ccw(c12.319,71.12) 10.668,71.12 10.668,67.564 cw(c8.763,67.564) 8.763,65.659 5.207,65.659 cw(c5.207,67.183) 3.683,67.183 3.683,76.168 cw(c7.7,76.168) 7.642,80.185 12.178,80.251 ccw(c12.081,86.93) 15.458,81.167 25.981,87.332 cw(c38.095,65.216)
AC_N on Top Layer "AC_N" (solid, pour order 16): 91.694,94.615 91.694,86.233 94.234,86.233 210.508,86.233 ccw(c210.508,86.418) 210.693,86.418 210.693,93.345 ccw(c209.423,93.345) 209.423,94.615
AC_N on Top Layer "AC_N_1_1" (solid, pour order 102): 208.631,73.193 208.631,84.526 210.709,86.416 191.77,86.416 193.548,84.638 193.548,72.842 ccw(c195.342,72.842) 195.342,71.049 206.486,71.049 ccw(c206.486,73.193)
AC_N on Top Layer "AC_N_1_1" (solid, pour order 101): 172.309,73.066 172.309,84.399 174.387,86.289 155.448,86.289 157.226,84.511 157.226,72.715 ccw(c159.02,72.715) 159.02,70.922 170.164,70.922 ccw(c170.164,73.066)
AC_N on Top Layer "AC_N_1_1" (solid, pour order 100): 136.749,73.193 136.749,84.526 138.827,86.416 119.888,86.416 121.666,84.638 121.666,72.842 ccw(c123.46,72.842) 123.46,71.049 134.604,71.049 ccw(c134.604,73.193)
AC_N on Top Layer "AC_N_1_1" (solid, pour order 12): 100.681,73.122 100.681,84.455 102.759,86.344 83.82,86.344 85.598,84.566 85.598,72.771 ccw(c87.392,72.771) 87.392,70.977 98.536,70.977 ccw(c98.536,73.122)
AC_N on Top Layer "NetJ_OUT_Relay_Channel4_1" (solid, pour order 22): 92.075,94.615 92.075,70.993 64.953,70.993 59.055,75.565 59.055,94.615

## Silkscreen, mask and mechanical layers (free items; w line width, h text height)
Mechanical 1:
  lines w0.254: 0.127,105.918 0.127,0 229.108,0 ; 229.108,0.127 229.108,104.775
Top Assembly:
  lines w0.254: 0.127,105.918 75.184,105.918 75.184,104.14 229.108,104.267

## Text inside footprints (layer, text, board x,y; h text height)
C1: Top Overlay "+" at 40.263,55.905 h1.5
C2: Top Overlay "+" at 61.599,37.998 h1.5
J2: Top Overlay "USB" at 48.514,13.716 h1.27 r90